# Altium PCB PCB_Main.PcbDoc (part 4 of 4)
Units mm, origin at the board's own origin, x right, y up, seen from the top; angles counter-clockwise.
Board outline 152.4 x 152.4 mm, 4 copper layers (Top Layer, GND1, GND2, Bottom Layer), stack 0.868 mm thick; 73 components, 60 nets, 294 pads, 5 vias.
Unrouted connection lines stored in the file: 166.
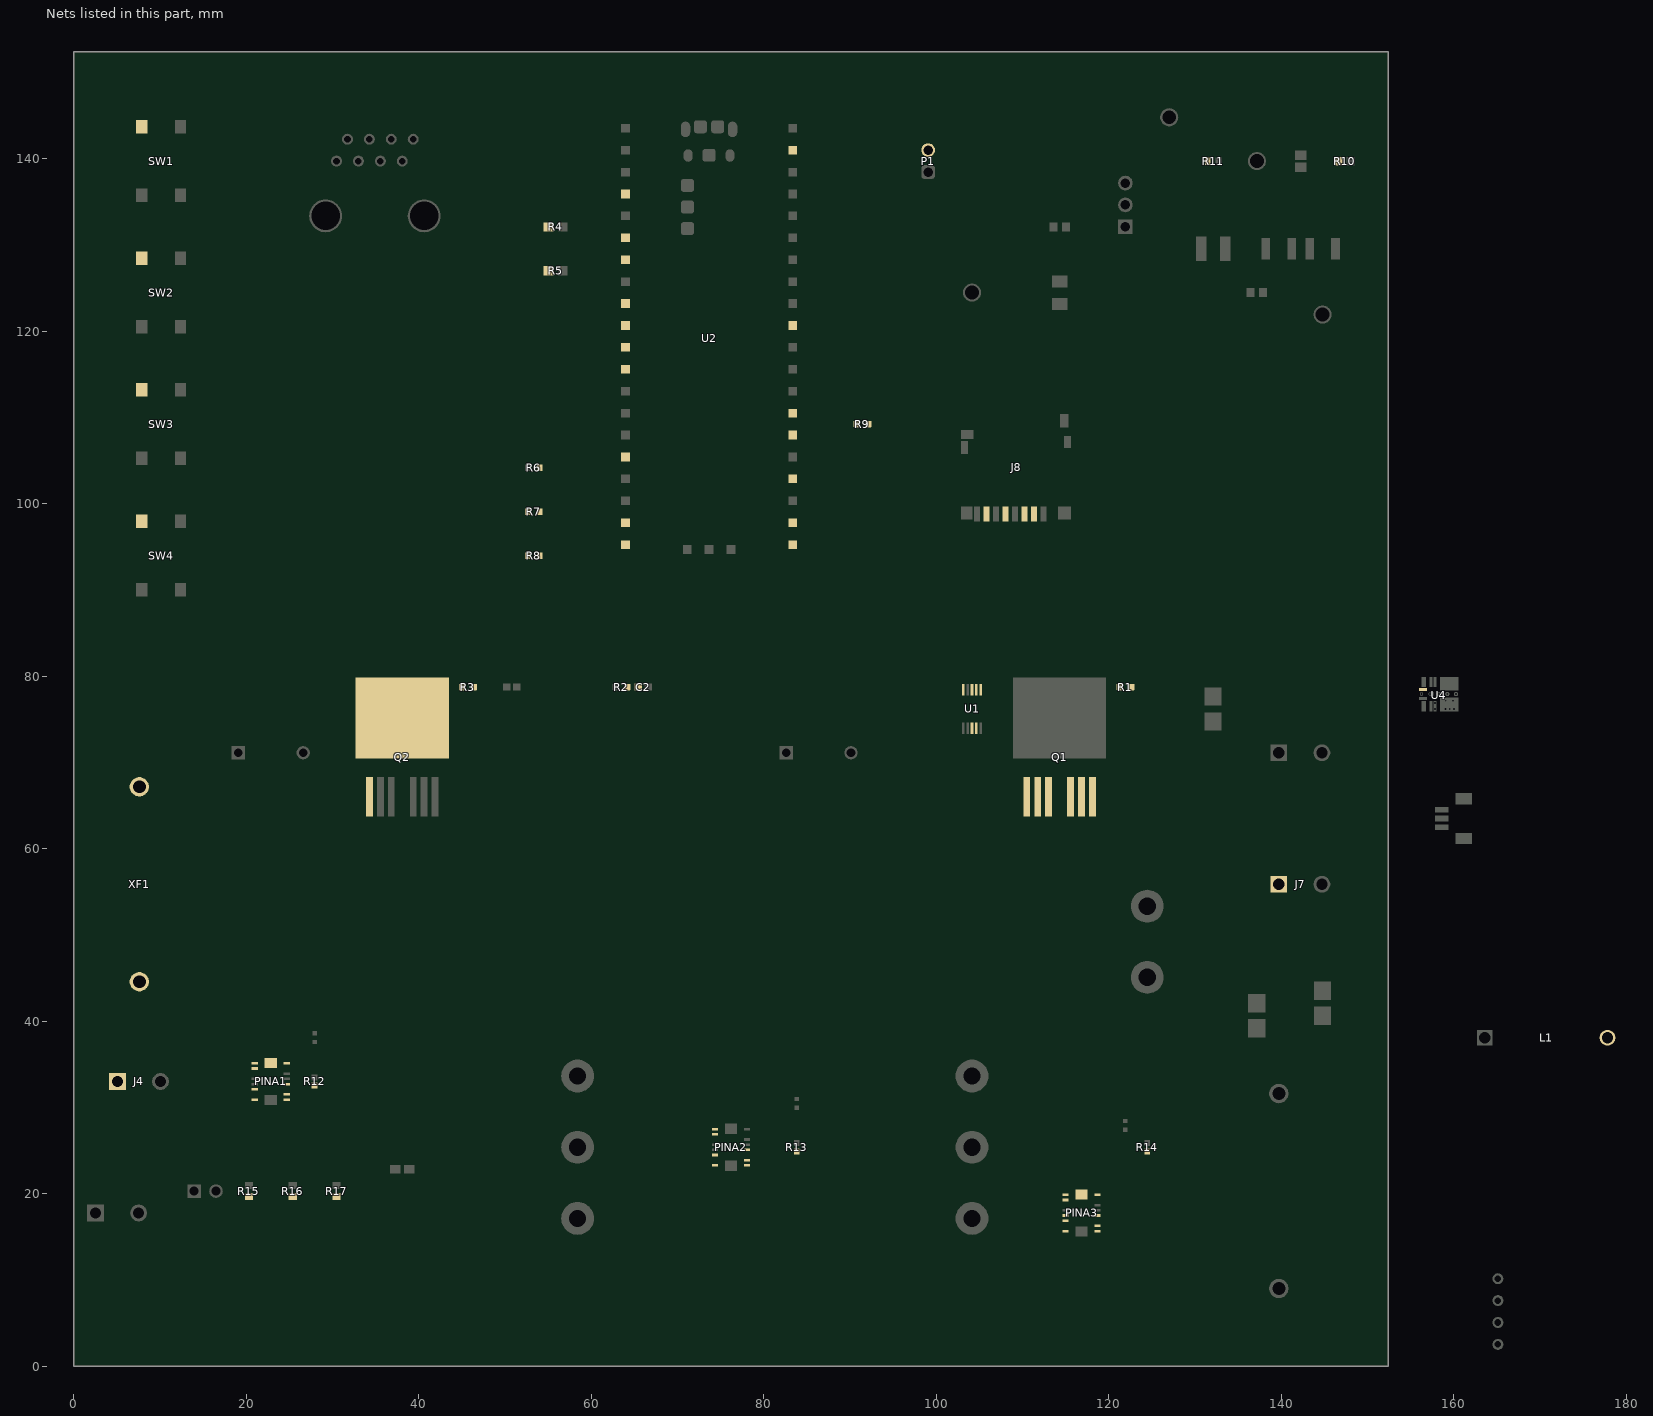
[diagram p5: the nets of this part, all layers, seen from the top]

## Via types
v1: diameter 1.27, hole 0.889, Top Layer to Bottom Layer, 5 vias

## Nets (pads, with @x,y where several pads share a name; then routed paths per layer and width w, separated by ;. In a path a pad name is that pad's centre, name@x,y a point inside that pad or via, vN(x,y) a via of type N, cw(c..) or ccw(c..) an arc to the next point about the centre after c; other vN are vias at no path point) (continued)
NetJ7_1: J7.1
NetJ8_2: J8.2 R17.1 U2.22
NetJ8_3: J8.3 R15.1
NetJ8_5: J8.5 U2.24
NetJ8_7: J8.7 R16.1 U2.21
NetP1_2: P1.2 U2.39
NetPINA1_1: PINA1.1 PINA1.2
NetPINA1_5: PINA1.5 PINA2.5 PINA3.5 R4.1 U2.6
NetPINA1_6: PINA1.6 PINA2.6 PINA3.4 PINA3.6 R5.1 U2.7
NetPINA1_8: PINA1.8 PINA1.9
NetPINA1_10: PINA1.10 R7.1 R12.1
NetPINA1_13: PINA1.13 PINA1.14 XF1.2
NetPINA2_1: PINA2.1 PINA2.2
NetPINA2_8: PINA2.8 PINA2.9
NetPINA2_10: PINA2.10 R8.1 R13.1
NetPINA3_1: PINA3.1 PINA3.2
NetPINA3_8: PINA3.8 PINA3.9
NetPINA3_10: PINA3.10 R9.1 R14.1
NetPINA3_13: PINA3.13 PINA3.14
NetQ1_1: Q1.1 R1.2
NetQ2_1: Q2.1 R3.2
NetR1_1: R1.1 U1.3
NetR2_2: R2.2 U1.6
NetR3_1: R3.1 U1.10
NetR6_2: R6.2 U2.16
NetR7_2: R7.2 U2.19
NetR8_2: R8.2 U2.20
NetR9_2: R9.2 U2.26
NetR10_1: R10.1 R11.1 U4.9
NetSW1_2: SW1.2 U2.9
NetSW2_2: SW2.2 U2.10
NetSW3_2: SW3.2 U2.11
NetSW4_2: SW4.2 U2.12
NetTP*2_1: U1.8 U2.4
NetTP*3_1: U1.7 U2.27
NetU2_31: U2.31
PV: J4.1 XF1.1
SW: C2.1 L1.2 Q1.2 Q1.3 Q1.5 Q1.6 Q1.7 Q2.8 U1.4
pads on no net: J1.4 J1.5 J5.2 J5.5 J5.6 J5.9 J5.10 J8.1 J8.8 J8.9 J8.10 J8.11 J8.12 J8.13 J8.14 L1.1 SW1.1 SW1.3 SW2.1 SW2.3 SW3.1 SW3.3 SW4.1 SW4.3 U1.5 U2.5 U2.13 U2.14 U2.17 U2.23 U2.25 U2.29 U2.30 U2.32 U2.33 U2.34 U2.35 U2.37 U2.38 U2.40 U2.A U2.B U2.C U2.D U2.D1 U2.D3 U2.TP1 U2.TP2 U2.TP3 U2.TP4 U2.TP5 U2.TP6 U4.1 U4.5 U4.6 U4.7 U4.12 U4.13 U4.14 U4.15 U4.16 U4.17 U4.18 U4.19 U4.20 U4.21 U4.22 U4.23
copper on no net:
  other v1: 7.62,78.74 55.88,78.74 71.12,78.74 96.52,78.74 124.46,78.74

## Polygon pours and split planes (outlines as drawn)
no net on GND1 "NONET_L02_P000" (solid, pour order 0): 0,152.4 0,0 152.4,0 152.4,152.4
no net on GND2 "NONET_L03_P001" (solid, pour order 1): 0,152.4 0,0 152.4,0 152.4,152.4

## Text inside footprints (layer, text, board x,y; h text height)
PINA1: Top Overlay "*" at 19.702,34.485 h1.27; Top 3D Body "*" at 21.683,34.485 h1.27
PINA2: Top Overlay "*" at 73.042,26.865 h1.27; Top 3D Body "*" at 75.023,26.865 h1.27
PINA3: Top Overlay "*" at 113.682,19.245 h1.27; Top 3D Body "*" at 115.663,19.245 h1.27
U4: Top Overlay "5V Buck" at 155.168,75.441 h1.27 r90